# EAGLE board LimitSwitch_opto (EAGLE 8.0.1)

Size 160 x 100 mm. Coordinates in mm from the lower left corner, seen from the top.
Outline: 0,0 160,0 160,100 0,100 0,0
Copper layers (1*16): Top 0.035mm / dielectric 1.5mm / Bottom 0.035mm
Design rules "default": minimum track width 10mil, minimum drill 24mil, track to track 8mil, track to pad 8mil, pad to pad 8mil, via to via 8mil, smd to smd 8mil, copper to edge 40mil, drill to drill 8mil, minimum pad ring 10mil, minimum via ring 8mil, stop-mask expansion 4mil, vias tented up to drill 0mil, thermal gap 10mil

## Footprints (pad centres in the part's own frame; a part is rotated, then mirrored left to right if it is on the bottom)
DO41-10 = drill 1.118: A 5.08,0; C -5.08,0
6410-02 = drill 1.016 long: 1 1.27,0; 2 -1.27,0
6410-08 = drill 1.016 long: 1 8.89,0; 2 6.35,0; 3 3.81,0; 4 1.27,0; 5 -1.27,0; 6 -3.81,0; 7 -6.35,0; 8 -8.89,0
DIP4 = drill 0.8: 1 -1.27,-3.81; 2 1.27,-3.81; 3 1.27,3.81; 4 -1.27,3.81
0204V = drill 0.813 octagon: 1 -1.27,0; 2 1.27,0
DRAGINO_SHIELD = drill 0.8 long: 2 36.83,50.8; 3 34.29,50.8; 3V3 13.97,2.54; 4 31.75,50.8; 5 29.21,50.8; 5V 16.51,2.54; 6 26.67,50.8; 7 24.13,50.8; 8 20.066,50.8; 9 17.526,50.8; 10 14.986,50.8; 11 12.446,50.8; 12 9.906,50.8; 13 7.366,50.8; A0 29.21,2.54; A1 31.75,2.54; A2 34.29,2.54; A3 36.83,2.54; A4 39.37,2.54; A5 41.91,2.54; AREF 2.286,50.8; GND@1 4.826,50.8; GND@2 21.59,2.54; GND@3 19.05,2.54; IOREF 8.89,2.54; P$32 6.35,2.54; RST 11.43,2.54; RX_1 39.37,50.8; TX_0 41.91,50.8; VIN 24.13,2.54 | drill 0.8 pad 1.676 octagon: +5V 44.577,30.481; GND 44.577,25.401; MISO 42.037,30.481; MOSI 44.577,27.941; RESET 42.037,25.401; SCK 42.037,27.941

## Placement (x,y rotation side)
D1  [DO41-10]  53.34,67.31 90 top
J1  22-27-2021-02  [6410-02]  16.51,60.96 270 top
L_SWITCHES  22-27-2081-08  [6410-08]  16.51,40.64 90 top
OK1  SFH618A-2  [DIP4]  46.99,39.37 180 top
OK2  SFH618A-2  [DIP4]  54.61,39.37 180 top
OK3  SFH618A-2  [DIP4]  62.23,39.37 180 top
OK4  SFH618A-2  [DIP4]  69.85,39.37 180 top
OK5  SFH618A-2  [DIP4]  77.47,39.37 180 top
OK6  SFH618A-2  [DIP4]  58.42,53.34 0 top
OK7  SFH618A-2  [DIP4]  66.04,53.34 0 top
OK8  SFH618A-2  [DIP4]  73.66,53.34 0 top
R1  2.2k  [0204V]  26.67,31.75 0 top
R2  2.2k  [0204V]  26.67,34.29 0 top
R3  2.2k  [0204V]  26.67,36.83 0 top
R4  2.2k  [0204V]  26.67,39.37 0 top
R5  2.2k  [0204V]  26.67,41.91 0 top
R6  2.2k  [0204V]  26.67,44.45 0 top
R7  2.2k  [0204V]  26.67,46.99 0 top
R8  2.2k  [0204V]  26.67,49.53 0 top
R9  1K  [0204V]  46.99,46.99 0 top
R10  1K  [0204V]  46.99,50.8 0 top
R11  1K  [0204V]  46.99,54.61 0 top
R12  1K  [0204V]  46.99,58.42 0 top
R13  1K  [0204V]  46.99,62.23 0 top
R14  1K  [0204V]  46.99,66.04 0 top
R15  1K  [0204V]  46.99,69.85 0 top
R16  1K  [0204V]  46.99,73.66 0 top
U$1  [DRAGINO_SHIELD]  83.82,80.01 180 top

## Library data of the parts
D1 = diode
J1 L_SWITCHES = con-molex; OC_FARNELL: unknown; OC_NEWARK: unknown
OK1-OK8 = optocoupler; MF: VISHAY/TELEFUNKEN; MPN: SFH618A-2; OC_FARNELL: 6424855; OC_NEWARK: 21H7744
R1-R16 = rcl
U$1 = Dragino_shield

## Nets
5V: R9.2 R10.2 R11.2 R12.2 R13.2 R14.2 R15.2 R16.2 U$1.+5V
12V: D1.A J1.2
D2: OK1.4 R9.1 U$1.2
D3: OK2.4 R10.1 U$1.3
D4: OK3.4 R11.1 U$1.4
D5: OK4.4 R12.1 U$1.5
D6: OK5.4 R13.1 U$1.6
D7: OK6.4 R14.1 U$1.7
D8: OK7.4 R15.1 U$1.8
D9: OK8.4 R16.1 U$1.9
GND: J1.1 OK1.3 OK2.3 OK3.3 OK4.3 OK5.3 OK6.3 OK7.3 OK8.3 U$1.GND U$1.GND@1 U$1.GND@2 U$1.GND@3
LIM_INPUT_1: L_SWITCHES.8 R1.1
LIM_INPUT_2: L_SWITCHES.7 R2.1
LIM_INPUT_3: L_SWITCHES.6 R3.1
LIM_INPUT_4: L_SWITCHES.5 R4.1
LIM_INPUT_5: L_SWITCHES.4 R5.1
LIM_INPUT_6: L_SWITCHES.3 R6.1
LIM_INPUT_7: L_SWITCHES.2 R7.1
LIM_INPUT_8: L_SWITCHES.1 R8.1
N$9: OK1.2 R1.2
N$10: OK2.2 R2.2
N$11: OK3.2 R3.2
N$12: OK4.2 R4.2
N$13: OK5.2 R5.2
N$14: OK6.2 R6.2
N$15: OK7.2 R7.2
N$16: OK8.2 R8.2
OPT_IN: D1.C OK1.1 OK2.1 OK3.1 OK4.1 OK5.1 OK6.1 OK7.1 OK8.1

## Tracks (layer width: path | path; a pad name or v marks a point on that pad's centre or on a via)
5V  (8 unrouted)
12V  (1 unrouted)
D2  (2 unrouted)
D3  (2 unrouted)
D4  (2 unrouted)
D5  (2 unrouted)
D6  (2 unrouted)
D7  (2 unrouted)
D8  (2 unrouted)
D9  (2 unrouted)
GND  (12 unrouted)
LIM_INPUT_1  (1 unrouted)
LIM_INPUT_2  (1 unrouted)
LIM_INPUT_3  (1 unrouted)
LIM_INPUT_4  (1 unrouted)
LIM_INPUT_5  (1 unrouted)
LIM_INPUT_6  (1 unrouted)
LIM_INPUT_7  (1 unrouted)
LIM_INPUT_8  (1 unrouted)
N$9  (1 unrouted)
N$10  (1 unrouted)
N$11  (1 unrouted)
N$12  (1 unrouted)
N$13  (1 unrouted)
N$14  (1 unrouted)
N$15  (1 unrouted)
N$16  (1 unrouted)
OPT_IN  (8 unrouted)